# Altium PCB PCB.PcbDoc
Units mm, origin at the board's own origin, x right, y up, seen from the top; angles counter-clockwise.
Board outline 60 x 45 mm, 2 copper layers (Top Layer, Bottom Layer); 28 components, 16 nets, 67 pads, 0 vias.
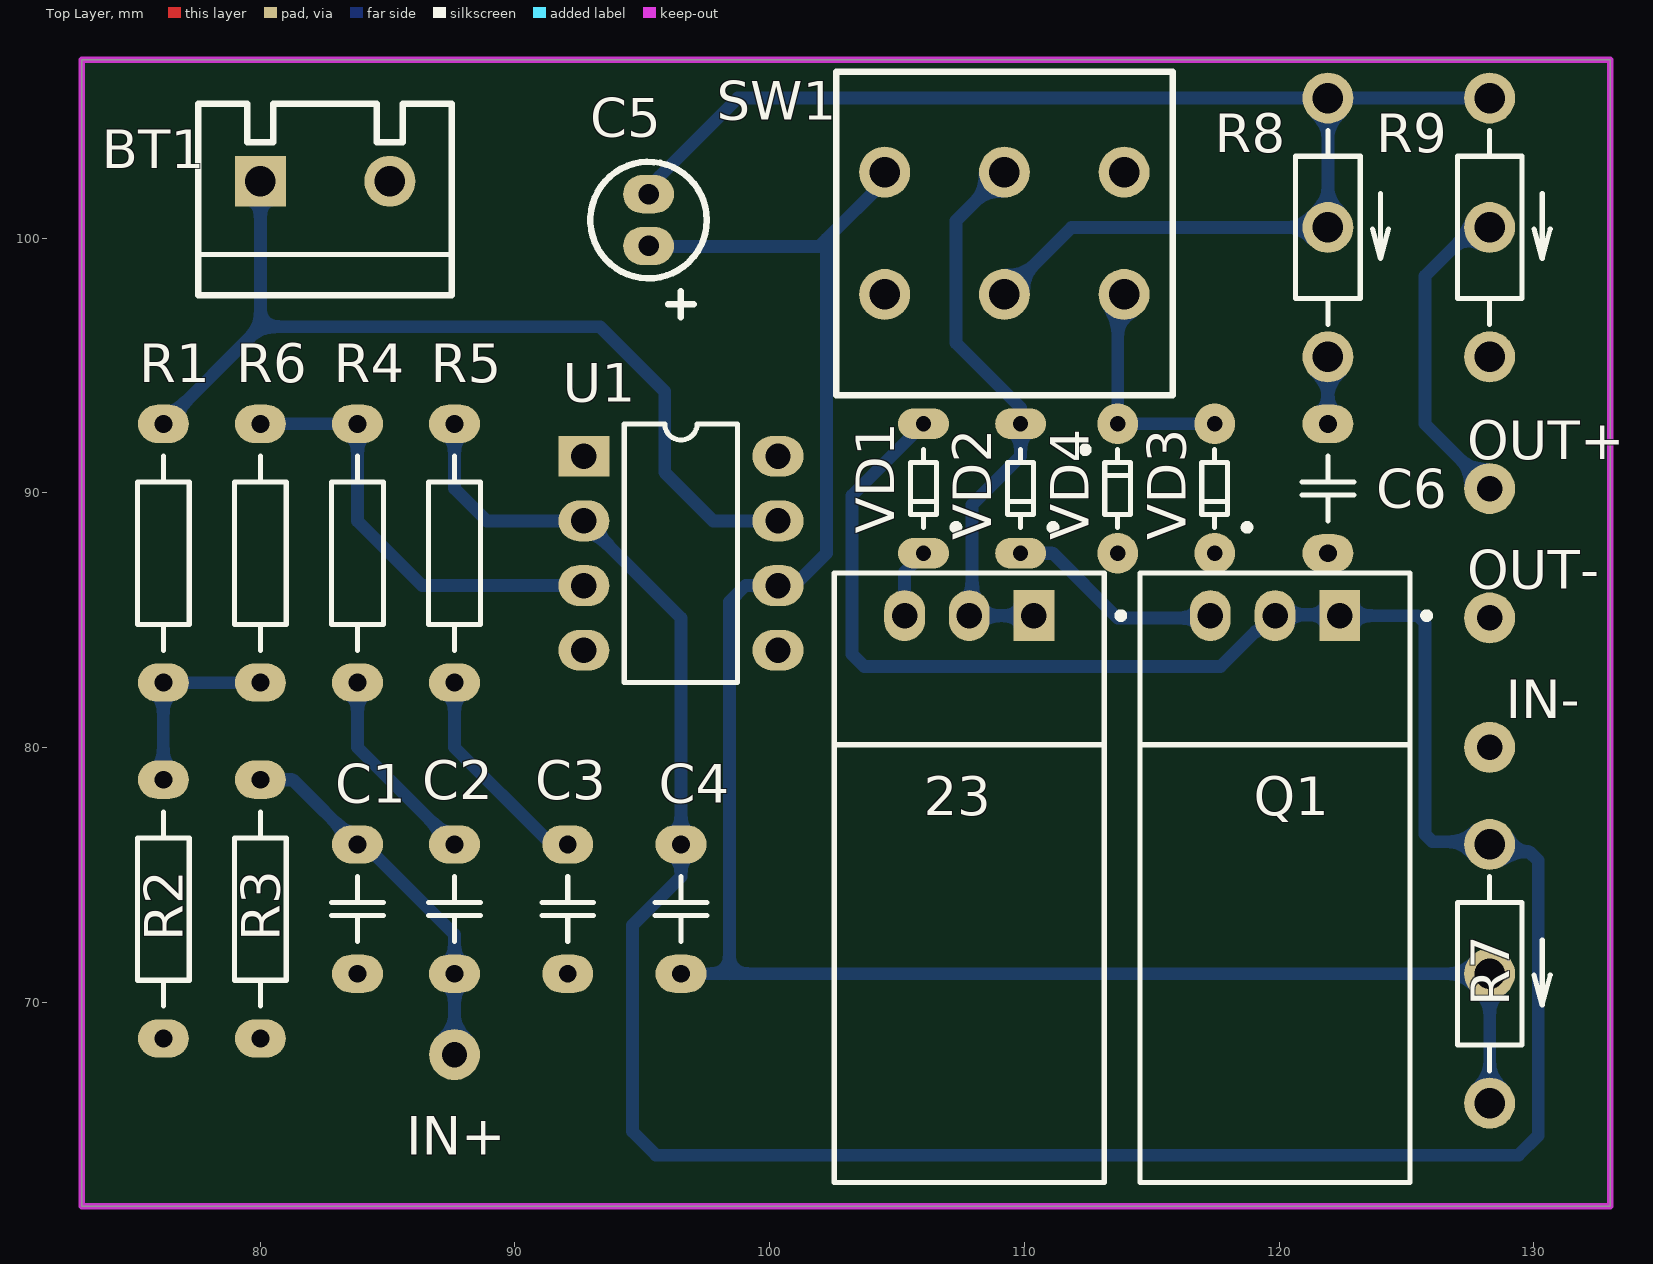
[diagram p0: Top Layer view]
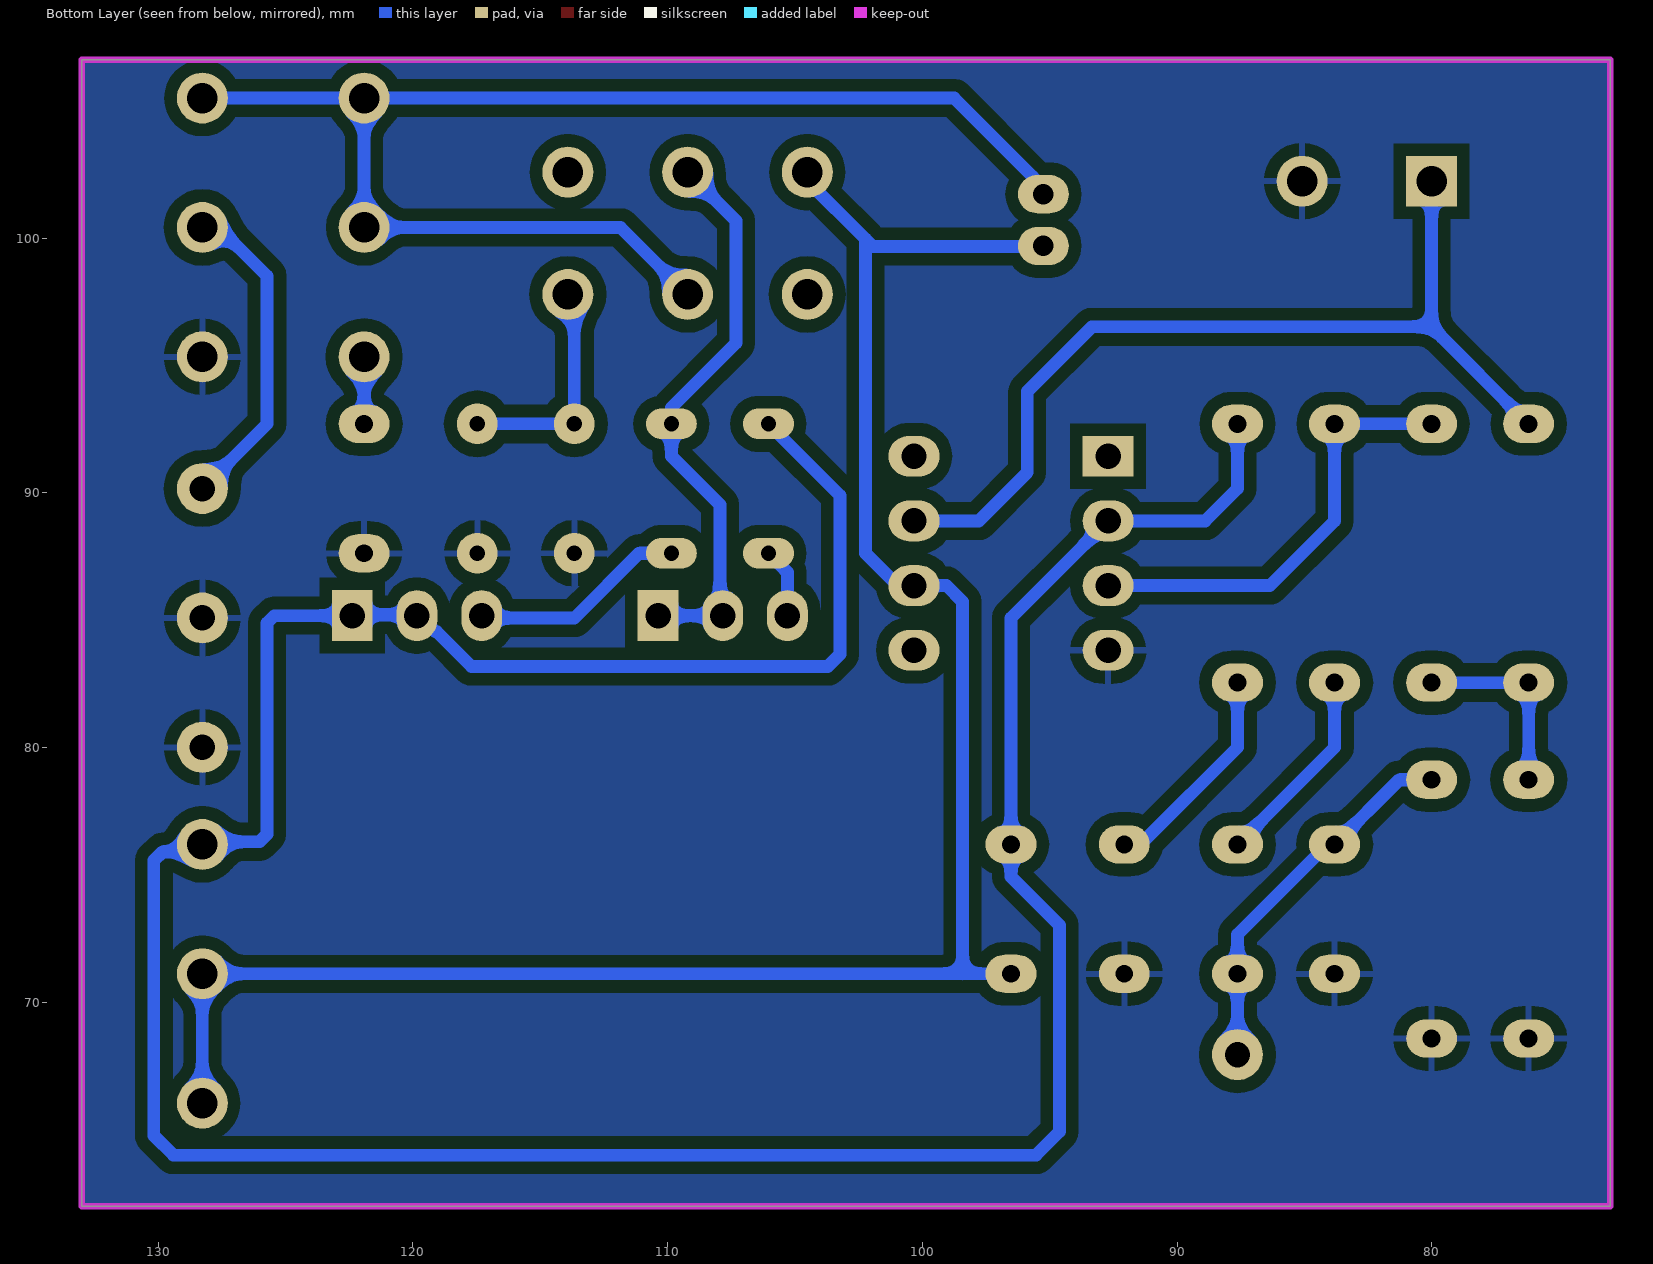
[diagram p1: Bottom Layer view, seen from below]

## Layer stack, top to bottom
Top Solder: solder mask 0.0102, Solder Resist, Dk 3.5
Top Layer: signal copper 0.0356
Dielectric 1: dielectric 0.32, FR-4, Dk 4.8
Bottom Layer: signal copper 0.0356
Bottom Solder: solder mask 0.0102, Solder Resist, Dk 3.5

## Board outline
73,62 73,107 133,107 133,62

## Design rules (kind name [scope] priority, off if disabled: settings)
Clearance Clearance_1 [All vs (OnLayer('Keep-Out Layer'))] p1: gap=0 ignorepadtopadclearanceinfootprint=TRUE
Clearance [All] p2: gap=0.5 ignorepadtopadclearanceinfootprint=TRUE
ComponentClearance ComponentClearance_1 [HasFootprint('PLS-1') vs HasFootprint('PLS-1')] p1: gap=0 collisioncheckmode=3 verticalgap=0 showdistances=FALSE
ComponentClearance [All] p2: gap=0.254 collisioncheckmode=3 verticalgap=0.254 showdistances=FALSE
Height [All] p1: minheight=0 maxheight=1270 prefheight=12.7
PlaneClearance [All] p1: clearance=0.5
PlaneConnect [All] p1: planeconnectstyle=Relief reliefexpansion=0.5 reliefentries=4 reliefconductorwidth=0.254 reliefairgap=0.254
PolygonConnect [All] p1: connectstyle=Relief reliefconductorwidth=0.254 reliefentries=4 polygonreliefangle="90 Angle" airgapwidth=0.5
RoomDefinition Sheet [InComponentClass('Sheet')] p1: confinementstyle=ConfineIn formatcopy=TRUE lockcomponents=FALSE outline 0,26.924 361.569,26.924 361.569,300.863 0,300.863
RoutingLayers [All] p1: top layer_v5=FALSE bottom layer_v5=TRUE
RoutingPriority RoutingPriority_PWR [InNetClass('PWR')] p1: routingpriority=1
RoutingPriority [All] p2: routingpriority=0
RoutingTopology RoutingTopology_PWR [InNetClass('PWR')] p1: topology=Daisy_Simple
RoutingTopology [All] p2: topology=Shortest
RoutingVias [All] p1: holewidth=0.711 width=1.27 viastyle="Through Hole" minholewidth=0.711 minwidth=1.27 maxholewidth=0.711 maxwidth=1.27
SMDEntry [All] p1: side=TRUE corner=FALSE anyangle=FALSE
SMDToCorner [All] p1: distance=0
SMDToPlane [All] p1: distance=0
SolderMaskExpansion [All] p1: expansion=0.102 istentingtop=FALSE
Width [All] p1: maxlimit=0.5 minlimit=0.5 preferedwidth=0.5
23 further rules are at their usual default settings.

## Classes and differential pairs
net class PWR: +4.5V +9V GND

## Components (designator, comment, footprint, x,y, rotation, side; value= is the part's Value field where it differs from the comment)
23 "IRLML0030TRPBF" "TO220 - HORIZONTAL" 107.843,85.158 r180 top (schematic designator Q2)
BT1 "+9V" "Power socket Mirrored" 82.55,102.235 r180 top
C1 "1nF" CAP-CER-DISK 83.82,76.2 r270 top
C2 "10nF" CAP-CER-DISK 87.63,76.2 r270 top
C3 "47nF" CAP-CER-DISK 92.075,71.12 r90 top
C4 "47pF" CAP-CER-DISK 96.52,76.2 r270 top
C5 "10uF" CAP-ELEC-5x11mm 95.25,100.711 r270 top
C6 "1nF" CAP-CER-DISK 121.92,92.71 r270 top
IN+ "IN" PLS-1 87.63,67.945 r90 top
IN- "PLS-1" PLS-1 128.27,80.01 r270 top
OUT+ "OUT" PLS-1 128.27,90.17 r180 top
OUT- "OUT" PLS-1 128.27,85.09 r270 top
Q1 "IRLML0030TRPBF" "TO220 - HORIZONTAL" 119.847,85.158 r180 top
R1 "10k" Res-Axis 76.2,82.55 r90 top value=1k
R2 "10k" Res-Axis 76.2,68.58 r90 top value=1k
R3 "1M" Res-Axis 80.01,68.58 r90 top value=1k
R4 "10k" Res-Axis 83.82,82.55 r90 top value=1k
R5 "1k" Res-Axis 87.63,82.55 r90 top
R6 "1M" Res-Axis 80.01,92.71 r270 top value=1k
R7 "50k" RES-POT-2 128.27,71.12 r270 top
R8 "100k" RES-POT-2 121.92,100.421 r270 top
R9 "100k" RES-POT-2 128.27,100.421 r270 top
SW1 "MTS-203" MTS-203 113.92,102.59 r270 top
U1 "TL071CP" DIP-8 92.71,91.44 r0 top
VD1 "1N4001" DIODE-AXIS#1 106.045,92.71 r270 top
VD2 "1N4001" DIODE-AXIS#1 109.855,92.71 r270 top
VD3 "1N4001" DIODE-AXIS#2 117.475,92.71 r270 top
VD4 "1N4001" DIODE-AXIS#2 113.665,87.63 r90 top

## Footprints (in the part's own frame and the unit in brackets; to place one, negate y for a bottom-side part, rotate by r counter-clockwise, add the part's x,y. Pads: shape width x height; smd on the part's side, far side on the other; paste and mask are expansions set on the pad)
CAP-CER-DISK [mm]
  oval 1.5x2 hole 0.7: 1(0,0) 2(5.08,0)
  silkscreen extent 1.27,-1.02 3.81,1.02, body extent -0.25,-1.11 5.33,1.1, height 7
CAP-ELEC-5x11mm [mm]
  oval 1.5x2 hole 0.8: A(1.016,0) C(-1.016,0)
  silkscreen extent -2.29,-2.28 3.81,2.29, body extent -2.53,-2.54 2.53,2.51, height 11.53
DIODE-AXIS#1 [mm]
  oval 1.2x2 hole 0.6: A(0,0) C(5.08,0)
  silkscreen extent 1.02,-0.51 4.19,1.4, body extent -0.18,-0.82 5.33,0.82, height 1.83
DIODE-AXIS#2 [mm]
  round 1.6 hole 0.6: A(0,0) C(5.08,0)
  silkscreen extent 1.02,-0.51 4.19,1.4, body extent -0.18,-0.82 5.33,0.82, height 1.83
DIP-8 [mm]
  rect 2x1.6 hole 1: 1(0,0)
  oval 2x1.6 hole 1: 2(0,-2.54) 3(0,-5.08) 4(0,-7.62) 5(7.62,-7.62) 6(7.62,-5.08) 7(7.62,-2.54) 8(7.62,0)
  silkscreen extent 1.59,-8.89 6.03,1.27, body extent -0.02,-8.51 7.85,0.89, height 4.44
MTS-203 [mm]
  round 2 hole 1.2: 1(0,0) 2(0,-4.7) 3(0,-9.4) 4(4.8,-9.4) 5(4.8,-4.7) 6(4.8,0)
  silkscreen extent -3.94,-11.3 8.76,1.9, body extent -3.95,-11.3 8.75,1.9, height 29.34
PLS-1 [mm]
  round 2 hole 1: 1(0,0)
  body extent -1.27,-1.27 1.27,1.27, height 8.54
"Power socket Mirrored" [mm]
  round 2 hole 1.2: G(-2.54,0)
  rect 2x2 hole 1.2: V(2.54,0)
  silkscreen extent -4.98,-3.05 4.98,4.47, body extent -5.02,-3.09 4.98,4.51, height 9.8
Res-Axis [mm]
  oval 1.5x2 hole 0.7: 1(0,0) 2(10.16,0)
  silkscreen extent 1.27,-1.02 8.89,1.02, body extent -0.3,-1.2 10.46,1.2, height 2.41
RES-POT-2 [mm]
  round 2 hole 1.2: 1(-5.08,0) 2(5.08,0) 3(0,0)
  silkscreen extent -3.81,-1.27 3.81,2.38
"TO220 - HORIZONTAL" [mm]
  rect 1.6x2 hole 1: 1(-2.537,-0.023)
  oval 1.6x2 hole 1: 2(0.003,-0.023) 3(2.543,-0.023)
  silkscreen extent -6.07,-1.69 5.3,22.22, body extent -5.08,-0.41 5.08,22.32, height 4.83

## Part data
23 Q1: library part "MOSFET N-CH", Manufacturer="Infineon Technologies", Author="Tarasov Maxim", Creation Date=12.06.2019, Part Number=IRLML0030TRPBF, Transistor Polarity=N-Channel, Код=32
BT1: library part Battery
C1 C2 C3 C4 C6: library part Cap
C5: library part Cap_Polar
IN+ OUT+ OUT-: library part PLS-1
R1 R2 R3 R4 R5 R6: library part Res
R7 R8 R9: library part Res_Pot
SW1: "DPDT"
U1: "Low-Noise JFET-Input General-Purpose Operational Amplifier, 7 to 36 V, 0 to 70 degC, 8-pin DIP (P8), Pb-Free (RoHS)", Manufacturer="Texas Instruments", Rating=Military, Total Supply Voltage(Max)(+5V is 5, +/-5V is 10)=36, Total Supply Voltage(Min)(+5V is 5, +/-5V is 10)=7, CMRR(Min)(dB)=70, Code_JEDEC=MS-001, ComponentLink1Description="Manufacturer URL", ComponentLink1URL=http://www.ti.com/, ComponentLink2Description=Datasheet, ComponentLink2URL=http://www.ti.com/lit/ds/symlink/tl071.pdf, ComponentLink3Description="Package Specification", ComponentLink3URL=http://www.ti.com/litv/pdf/mpdi001b, DatasheetVersion=SLOS080J, Eco-Plan="Pb-Free (RoHS)", GBW(Typ)(MHz)=3, IIB(Max)(pA)=200, Iq per channel(Max)(mA)=2.5, Mounting Technology="Through Hole", Number of Channels=1, Offset Drift(Typ)(uV/C)=18, PackageDescription="8-Pin Plastic In-Line, Body 9.59 x 6.35 mm, Pitch 2.54 mm", PackageReference=P0008A, PackageVersion="4040082/E, 04/2010", PartNumber=TL071CP, Slew Rate(Typ)(V/us)=13, Sub Family="General Purpose Amplifier, High Supply Voltage Amplifier (>=30V)", Vio (25C)(Max)(mV)=10, Vn at 1kHz(Typ)(nV/rtHz)=18
VD1 VD2 VD3 VD4: library part Diode

## Nets (pads, with @x,y where several pads share a name; then routed paths per layer and width w, separated by ;. In a path a pad name is that pad's centre, name@x,y a point inside that pad or via, vN(x,y) a via of type N, cw(c..) or ccw(c..) an arc to the next point about the centre after c; other vN are vias at no path point)
+4.5V: R1.1 R2.2 R6.2 | length 7.6
  Bottom Layer w0.5: R2.2 R1.1 R6.2
+9V: BT1.V R1.2 U1.7 | length 36.4
  Bottom Layer w0.5: R1.2 80.01,96.52 ; BT1.V 80.01,96.52 ; U1.7 97.79,88.9 95.885,90.805 95.885,93.98 93.345,96.52 80.01,96.52
GND: BT1.G C1.2 C3.1 C6.2 IN-.1 OUT-.1 R2.1 R3.1 R9.2 U1.4 VD3.C VD4.A
NetC1_1: C1.1 C2.2 IN+.1 R3.2 | length 14.9
  Bottom Layer w0.5: R3.2 81.28,78.74 C1.1 84.091,76.2 87.63,72.661 IN+.1
NetC2_1: C2.1 R4.1 | length 7.9
  Bottom Layer w0.5: R4.1 83.82,80.01 C2.1
NetC3_2: C3.2 R5.1 | length 8.6
  Bottom Layer w0.5: R5.1 87.63,80.01 91.249,76.391 91.884,76.391 C3.2
NetC4_1: C4.1 Q1.1 Q1.2 R5.2 R7.1 U1.2 VD1.A | length 128.6
  Bottom Layer w0.5: R5.2 87.63,90.17 88.9,88.9 U1.2 96.52,85.09 C4.1 96.52,74.93 94.615,73.025 94.615,64.928 95.543,64 129.405,64 130.175,64.77 130.175,75.565 129.827,75.913 128.557,75.913 R7.1 128.168,76.302 126.023,76.302 125.73,76.595 125.73,84.888 125.437,85.181 Q1.1 122.345,85.22 Q1.2@119.844,85.22 ; VD1.A 103.235,89.9 103.235,83.667 103.717,83.185 117.7,83.185 119.074,84.559 119.124,84.559 119.746,85.181 Q1.2
NetC6_1: C6.1 R8.2 | length 3.3
  Bottom Layer w0.5: C6.1 R8.2@121.92,95.976
NetOUT+_1: OUT+.1 R9.3 | length 13
  Bottom Layer w0.5: OUT+.1 125.73,92.71 125.73,98.516 R9.3@128.27,101.056
NetQ1_3: Q1.3 VD2.C | length 8.4
  Bottom Layer w0.5: VD2.C 111.125,87.63 113.665,85.09 Q1.3@117.164,85.09
NetQ2_3: 23.3 VD1.C | length 2.8
  Bottom Layer w0.5: 23.3 105.3,86.885 VD1.C
NetR4_2: R4.2 R6.1 U1.3 | length 17.6
  Bottom Layer w0.5: R6.1 R4.2 83.82,88.9 86.36,86.36 U1.3
SW_Distortion_A: C5.C R8.1 R8.3 R9.1 SW1.5 | length 52.8
  Bottom Layer w0.5: C5.C@95.376,102.124 95.675,102.423 98.753,105.501 R8.1 ; SW1.5 111.851,100.421 R8.3 ; R8.3@121.703,100.839 121.92,101.056 R8.1 ; R9.1 R8.1
SW_Distortion_B: SW1.6 VD3.A VD4.C | length 9
  Bottom Layer w0.5: VD4.C 113.665,97.535 SW1.6 ; VD4.C@113.792,92.71 VD3.A@117.574,92.71
SW_Overdrive_A: 23.1 23.2 SW1.2 VD2.A | length 22.9
  Bottom Layer w0.5: SW1.2 107.315,100.685 107.315,95.885 109.855,93.345 109.855,91.44 107.95,89.535 107.95,85.181 23.1@110.819,85.181
SW_Overdrive_B: C4.2 C5.A R7.2 R7.3 SW1.3 U1.6 | length 79.4
  Bottom Layer w0.5: C5.A@94.943,99.67 101.942,99.67 102.235,99.963 ; C4.2 98.425,71.12 ; SW1.3 104.52,102.248 102.235,99.963 ; R7.2 R7.3 98.425,71.12 ; 98.425,71.12 98.425,85.725 99.06,86.36 U1.6 100.54,86.57 101.175,86.57 102.235,87.63 102.235,99.963
pads on no net: SW1.1 SW1.4 U1.1 U1.5 U1.8

## Polygon pours and split planes (outlines as drawn)
GND on Bottom Layer "GND_L02_P000" (solid, pour order 0): 73,62 73,107 133,107 133,62

## Keep-outs
Keep-Out Layer:
  the board outline again, w0.254